# EAGLE board ece411_t2_schematic_5 (EAGLE 9.5.2)

Size 100 x 80 mm. Coordinates in mm from the lower left corner, seen from the top.
Outline: 0,0 100,0 100,80 0,80 0,0
Copper layers (1*16): Top 0.035mm / dielectric 1.5mm / Bottom 0.035mm
Design rules "default": minimum track width 6mil, minimum drill 0.35mm, track to track 6mil, track to pad 6mil, pad to pad 6mil, via to via 6mil, smd to smd 6mil, copper to edge 40mil, drill to drill 6mil, minimum pad ring 10mil, minimum via ring 8mil, stop-mask expansion 4mil, vias tented up to drill 0mil, thermal gap 10mil

## Footprints (pad centres in the part's own frame; a part is rotated, then mirrored left to right if it is on the bottom)
0402 = smd 0.85 x 0.9: 1 -0.58,0; 2 0.58,0
2X3 = drill 1.016 pad 1.88: 1 0,0; 2 0,2.54; 3 2.54,0; 4 2.54,2.54; 5 5.08,0; 6 5.08,2.54
1X02 = drill 1.016 pad 1.88: 1 0,0; 2 2.54,0
1X03 = drill 1.016 pad 1.88: 1 0,0; 2 2.54,0; 3 5.08,0
POWER_JACK_PTH = drill 2.997 pad 4.318: GND 0,7.7; GNDBREAK 4.7,10.7; PWR 0,13.7
0603 = smd 1.1 x 1: 1 -0.85,0; 2 0.85,0
MA04-1 = drill 1.016 long: 1 -3.81,0; 2 -1.27,0; 3 1.27,0; 4 3.81,0
TO92 = drill 0.813 octagon: 1 1.27,0; 2 0,1.905; 3 -1.27,0
DIP28 = drill 0.813 pad 1.626: 1 -16.51,-3.81; 2 -13.97,-3.81; 3 -11.43,-3.81; 4 -8.89,-3.81; 5 -6.35,-3.81; 6 -3.81,-3.81; 7 -1.27,-3.81; 8 1.27,-3.81; 9 3.81,-3.81; 10 6.35,-3.81; 11 8.89,-3.81; 12 11.43,-3.81; 13 13.97,-3.81; 14 16.51,-3.81; 15 16.51,3.81; 16 13.97,3.81; 17 11.43,3.81; 18 8.89,3.81; 19 6.35,3.81; 20 3.81,3.81; 21 1.27,3.81; 22 -1.27,3.81; 23 -3.81,3.81; 24 -6.35,3.81; 25 -8.89,3.81; 26 -11.43,3.81; 27 -13.97,3.81; 28 -16.51,3.81
TO-220-ALT = drill 1.016 long: GND 0,-3.81; IN -2.54,-3.81; OUT 2.54,-3.81 | hole 3.302: 0,11.176

## Placement (x,y rotation side)
C1  0.1uF  [0402]  27.55,32.6 0 top
C2  0.1uF  [0402]  11.85,41.66 0 top
C3  0.1uF  [0402]  19.78,41.61 0 top
J1  AVR_SPI_PROG_3X2PTH  [2X3]  27.64,46.73 0 top
J2  [1X02]  59.69,25.4 0 top
J3  [1X02]  59.69,48.26 0 top
J5  455-1750-1-ND  [1X03]  72.39,38.1 0 top
J6  455-1750-1-ND  [1X03]  72.39,31.75 0 top
J7  455-1750-1-ND  [1X03]  72.39,44.45 0 top
J9  POWER_JACK  [POWER_JACK_PTH]  16.21,24.05 0 top
R1  10k  [0402]  27.44,39.37 0 top
R2  2.2k  [0603]  27.47,37.55 0 top
R3  2.2k  [0603]  27.46,35.61 0 top
SV1  [MA04-1]  84.22,36.91 90 top
T2  2N3904  [TO92]  53.34,46.99 0 top
T4  2N3904  [TO92]  53.58,27.71 180 top
U1  328P  [DIP28]  50.8,36.83 180 top
U2  [TO-220-ALT]  15.86,49.77 0 top

## Library data of the parts
C1-C3 = SparkFun-Capacitors; PROD_ID: CAP-14993
J1 = SparkFun-Connectors
J2 J3 = SparkFun-Retired
J5-J7 = SparkFun-Connectors; PROD_ID: XXX-00000
J9 = SparkFun-Connectors; PROD_ID: CONN-08197
R1 = SparkFun-Resistors; PROD_ID: RES-14241
R2 R3 = SparkFun-Resistors; PROD_ID: RES-08272
SV1 = con-lstb; OC_FARNELL: unknown; OC_NEWARK: unknown
T2 T4 = transistor
U1 = SparkFun-IC-Microcontroller; PROD_ID: IC-09136
U2 = SparkFun-IC-Power; PROD_ID: VREG-08450; SF_ID: COM-00107

## Nets
GND: C1.2 C2.2 C3.2 J1.6 J5.3 J6.3 J7.3 J9.GNDBREAK SV1.4 T2.3 T4.3 U1.8 U1.22 U2.GND
MOSI: J1.4 U1.17
N$1: R3.1 U1.12
N$2: J3.2 T2.1
N$3: R2.2 T4.2
N$4: R3.2 T2.2
N$5: J1.1 U1.18
N$6: J9.GND
N$7: J5.1 U1.4
N$8: J7.1 U1.3
N$9: J6.1 U1.2
N$10: J1.5 R1.2 U1.1
N$11: SV1.2 U1.15
N$12: SV1.3 U1.14
N$15: R2.1 U1.13
SCK: J1.3 U1.19
VCC: C1.1 C3.1 J1.2 J2.1 J2.2 J3.1 J5.2 J6.2 J7.2 R1.1 SV1.1 T4.1 U1.7 U1.20 U1.21 U2.OUT
VIN: C2.1 J9.PWR U2.IN

## Tracks (layer width: path | path; a pad name or v marks a point on that pad's centre or on a via)
GND  (13 unrouted)
MOSI  (1 unrouted)
N$1  (1 unrouted)
N$2  (1 unrouted)
N$3  (1 unrouted)
N$4  (1 unrouted)
N$5  (1 unrouted)
N$7  (1 unrouted)
N$8  (1 unrouted)
N$9  (1 unrouted)
N$10  (2 unrouted)
N$11  (1 unrouted)
N$12  (1 unrouted)
N$15  (1 unrouted)
SCK  (1 unrouted)
VCC  (15 unrouted)
VIN  (2 unrouted)